# Altium PCB PCB1.PcbDoc (part 3 of 4)
Units mil, origin at the board's own origin, x right, y up, seen from the top; angles counter-clockwise.
Board outline 7000 x 4400 mil, 4 copper layers (Top Layer, Layer 1, Layer 2, Bottom Layer), stack 23.756 mil thick; 175 components, 152 nets, 661 pads, 108 vias.
Unrouted connection lines stored in the file: 53.
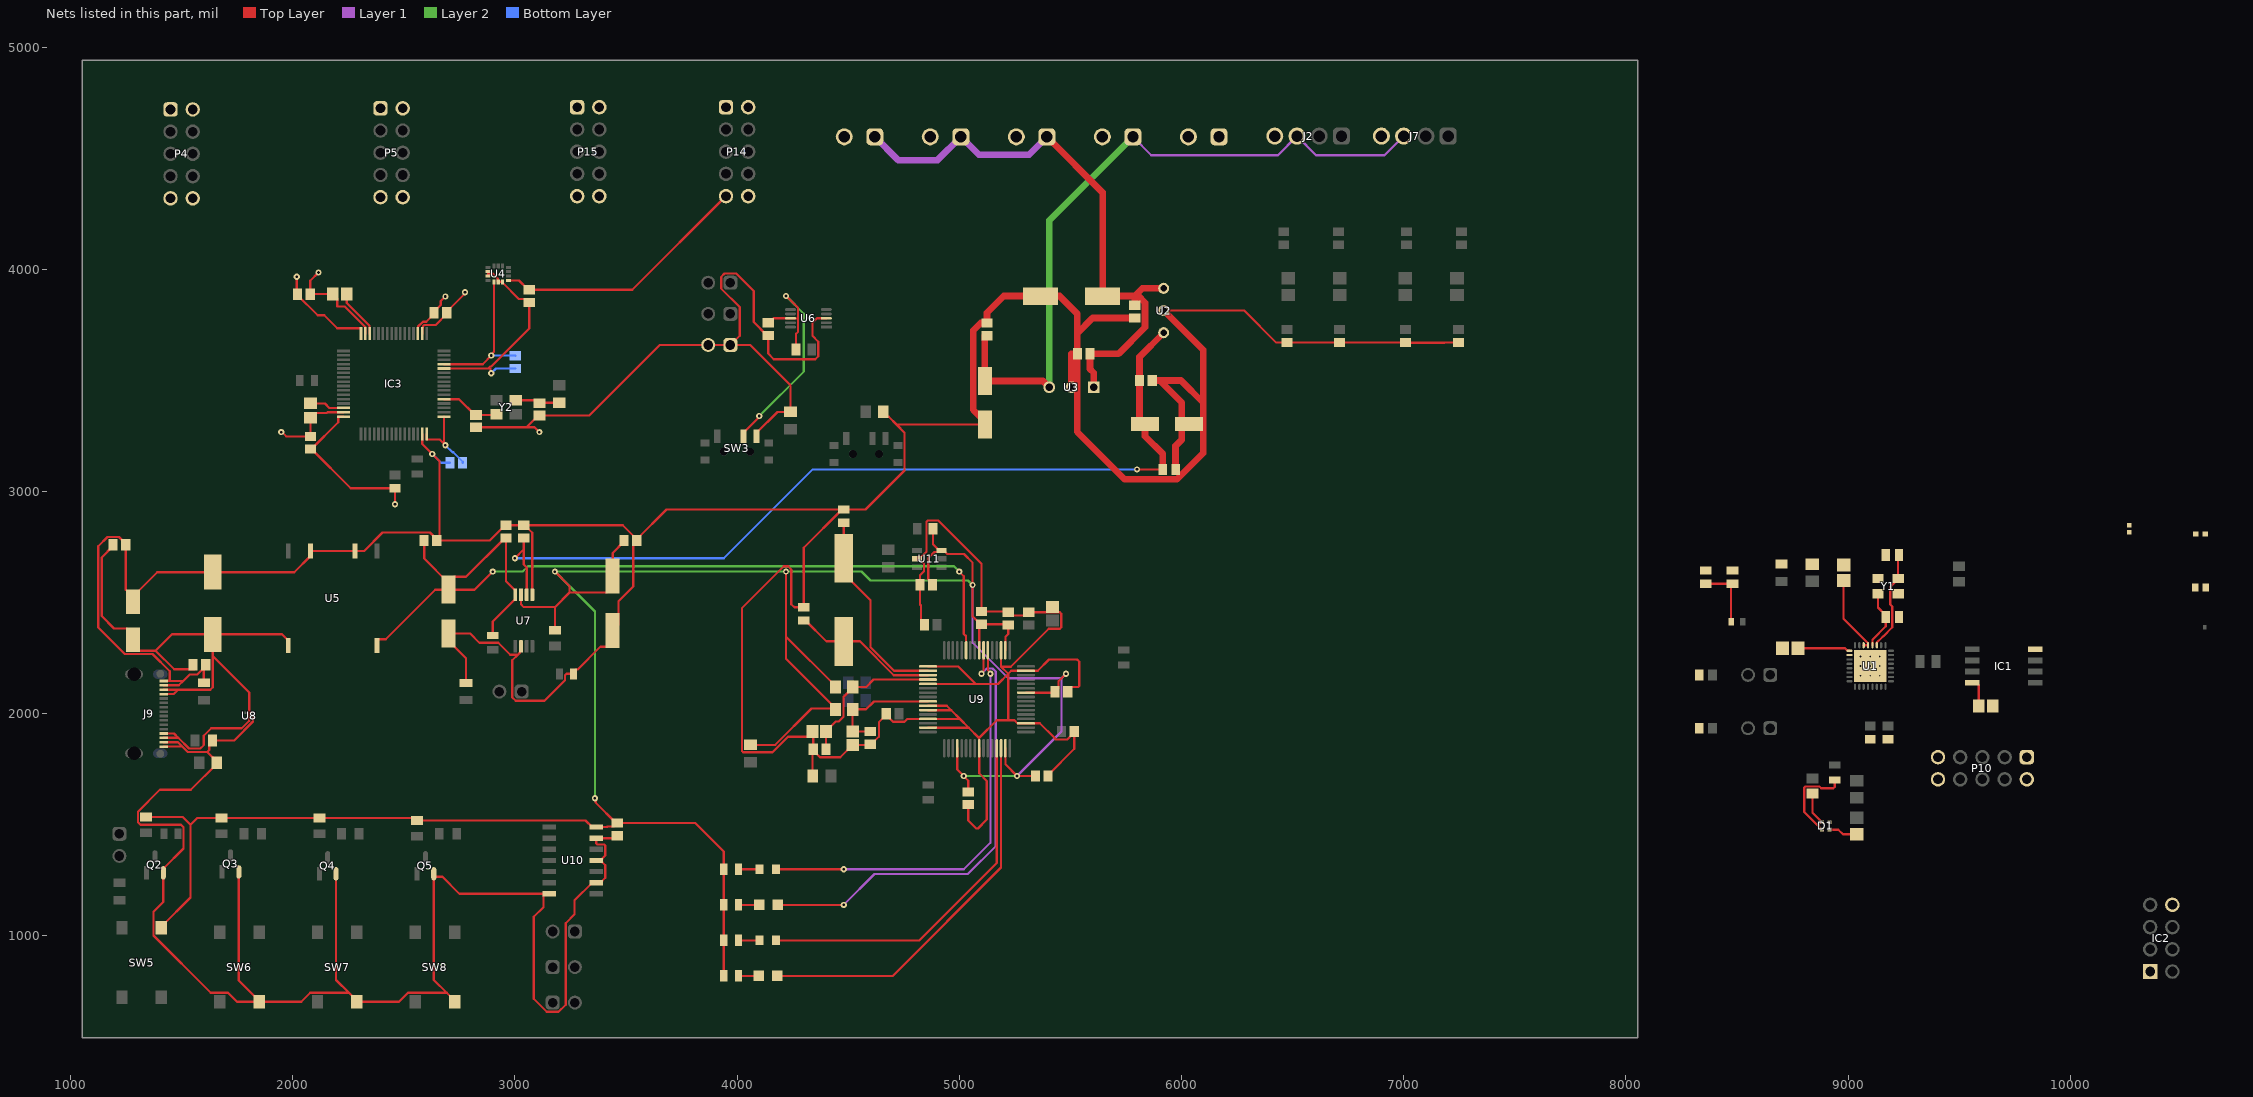
[diagram p4: the nets of this part, all layers, seen from the top]

## Via types
v1: diameter 28, hole 12, Top Layer to Bottom Layer, 98 vias
v2: diameter 19.68, hole 7.87, Top Layer to Bottom Layer, 9 vias
v3: diameter 15, hole 10, Top Layer to Bottom Layer, 1 vias

## Nets (pads, with @x,y where several pads share a name; then routed paths per layer and width w, separated by ;. In a path a pad name is that pad's centre, name@x,y a point inside that pad or via, vN(x,y) a via of type N, cw(c..) or ccw(c..) an arc to the next point about the centre after c; other vN are vias at no path point) (continued)
GND: (continued)
  Top Layer w10: C30.1@1280,2503.31 C30.1@1280,2526.93 ; J9.A12@1419.76,1852.36 1503.14,1852.36 ; J9.B1@1419.76,1872.05 1483.46,1872.05 1503.14,1852.36 ; J9.B12@1419.76,2127.95 1487.55,2127.95 1507.24,2147.64 ; J9.A1@1419.76,2147.64 1507.24,2147.64 ; 1440.66,2148.54 1446.52,2154.4 1446.52,2191.42 1369.04,2268.9 1244.36,2268.9 1125,2388.26 1125,2753.95 1166.64,2795.59 1217.87,2795.59 1248.54,2764.92 C31.1@1248.54,2760 1248.54,2558.39 C30.1@1280,2526.93 ; R39.1@1600,2140 C35.1@1600,2206.54 ; C35.1@1608.54,2220 1600,2211.46 C35.1@1600,2206.54 ; Q3.2@1757.4,1288.33 1757.4,799.61 1848.58,708.43 SW6.2@1848.58,703.5 ; U8.3@1821.57,1991.7 1821.57,1965.36 1736.2,1880 R43.1@1638.74,1880 1624.05,1865.31 1624.05,1837.24 1615.24,1828.43 ; v1(1948.82,3267.72) 1951.49,3267.72 1970.66,3248.54 C24.1@2080,3248.54 C18.2@2080,3333.28 2100.68,3353.96 2152.82,3353.96 2155.91,3357.05 IC3.47@2229.09,3357.05 ; v1(2116.14,3986.22) 2078.98,3949.06 C23.1@2078.98,3889.06 C19.2@2180.17,3889.06 2200.85,3868.37 2200.85,3833.29 2234.07,3833.29 2326.14,3741.21 2326.14,3711.81 IC3.31@2327.05,3710.91 ; Q4.2@2194.8,1280 2194.8,802.2 2252.99,744.02 ; IC3.63@2582.95,3259.09 2582.95,3214.29 v1(2627.95,3169.29) 2660,3137.24 2660,2791.46 C32.1@2648.54,2780 ; IC3.18@2582.95,3710.91 2582.95,3734.04 2586.73,3737.82 2586.73,3744.08 2592.59,3749.94 2643.41,3749.94 2693.54,3800.08 C21.1@2693.54,3805 2693.54,3809.92 2772.15,3888.52 2772.15,3894.19 v1(2775.59,3897.64) ; Q5.2@2634.8,1280 Q5.2@2634.8,1272.27 ; IC3.12@2680.91,3553.9 2879.74,3553.9 2883.76,3557.93 ; SW8.2@2728.58,703.5 2728.58,708.43 2692.99,744.02 ; R42.1@2780,2138.39 2780,2250.08 2700,2330.08 C29.1@2700,2361.57 2798.43,2361.57 2840,2320 2924.97,2320 2979.02,2265.94 3013.47,2265.94 ; C25.1@2824.8,3289.37 3052.01,3289.37 ; U4.3@2879.23,3970.16 2879.23,3980 ; U4.2@2879.23,3989.84 2879.23,3980 ; v1(2893.7,3532.99) 2890.26,3536.44 2890.26,3551.44 2883.76,3557.93 ; U7.2@3027.2,2303.5 3023.35,2299.65 3023.35,2275.82 3013.47,2265.94 ; U7.5@3078.39,2535.79 3078.39,2815.08 C39.1@3044.92,2848.54 ; v1(3110.24,3267.72) 3088.58,3289.37 3052.01,3289.37 ; U10.7@3153.7,1190 U10.7@3135,1190 ; U10.11@3366.3,1340 U10.11@3385,1340 ; C54.1@3460,1451.46 3448.54,1440 U10.13@3366.3,1440 3366.3,1417.67 3372.16,1411.81 3400.95,1411.81 3406.81,1405.95 3406.81,1361.81 U10.11@3385,1340 ; SW3.3@4087.64,3248.9 4087.64,3264.65 4181.73,3358.74 R40.1@4240,3358.74 4240,3478.79 4058.79,3660 P7.1@3970,3660 ; R55.1@4340,1720 4340,1837.09 C50.1@4342.91,1840 ; U6.3@4401.48,3780 4360,3780 4340,3760 4340,3700 4365.12,3674.88 4365.12,3609.28 4351.84,3596 4165.21,3596 4140,3621.21 C33.1@4140,3702.91 4135.08,3702.91 4075,3762.99 4075,3902.91 3996.41,3981.5 3943.59,3981.5 3928.5,3966.41 3928.5,3913.59 4011.5,3830.6 4011.5,3701.5 P7.1@3970,3660 ; R41.1@4658.74,3360 4658.74,3355.08 4677.36,3336.46 4682.28,3336.46 4717.17,3301.57 ; C40.1@4671.46,2000 C40.1@4671.46,1995.08 ; C42.1@4842.91,2400 4827.24,2415.67 4827.24,2487.83 4822.91,2492.16 C55.1@4822.91,2580 4822.91,2622.91 4841.42,2641.42 4841.42,2675.95 4835.56,2681.81 4835.2,2681.81 4819.61,2697.4 U11.2@4809.76,2697.4 4816.57,2704.21 4826.78,2704.21 4852.43,2729.87 4852.43,2863.77 4858.29,2869.63 4905.95,2869.63 5100,2675.58 C46.1@5100,2460 5217.09,2460 5235,2442.09 5312.36,2442.09 5327.23,2456.96 5452.81,2456.96 5458.67,2451.11 5458.67,2388.57 5452.81,2382.71 5402.71,2382.71 5232.13,2212.13 5187.87,2212.13 ; U9.15@4859.13,1937.64 5042.36,1937.64 ; U9.11@4859.13,2016.38 4963.62,2016.38 ; U9.10@4859.13,2036.06 4943.94,2036.06 4963.62,2016.38 ; U9.5@4859.13,2134.49 5074.32,2134.49 ; U9.1@4859.13,2213.23 4995.58,2213.23 5074.32,2134.49 ; C43.1@5040,1591.46 5040.59,1590.86 5040.59,1519.41 5075.86,1484.14 5084.14,1484.14 5124,1524 5124,1697.21 5089.45,1731.77 U9.25@5089.45,1845.12 5089.1,1845.46 5089.1,1890.9 ; C15.1@5115,3301.57 4717.17,3301.57 ; U9.51@5187.87,2286.06 5187.87,2212.13 ; C44.1@5400,1720 5400,1724.92 5517.09,1842.01 5517.09,1915.08 5486.42,1884.41 5435.19,1884.41 5429.33,1890.27 5429.33,1890.67 5362.68,1957.32 U9.35@5300.08,1957.32 5299.73,1957.67 5261.49,1957.67 5248.74,1970.42 5220,1970.42 ; C45.1@5488.54,2100 5488.54,2104.92 5504.21,2120.59 5534.14,2120.59 5540,2126.45 5540,2234.14 5530.14,2244 5404,2244 5353.54,2193.54 U9.47@5300.08,2193.54 5233.54,2193.54 5220,2180 ; U2.2@5920,3815 6282.44,3815 6427,3670.44 R20.1@6474.09,3670.44 R21.1@6711.36,3670.44 R26.1@7008.64,3670.44 7008.64,3670 7183.56,3670 7184,3670.44 R27.1@7245.91,3670.44 ; C30.1@1280,2526.93 1390.24,2637.17 C28.1@1640,2637.17 2006.67,2637.17 2080,2710.5 U5.9@2080,2733 U5.7@2280,2733 2321.36,2733 2403.95,2815.59 2617.87,2815.59 2648.54,2784.92 C32.1@2648.54,2780 ; 1503.14,1852.36 1527.08,1828.43 1615.24,1828.43 ; 1507.24,2147.64 1536.17,2176.57 1570.04,2176.57 C35.1@1600,2206.54 ; 1615.24,1828.43 1658.74,1784.92 R47.2@1658.74,1780 1658.74,1775.08 1541.52,1657.86 1402.02,1657.86 1303.43,1559.26 1303.43,1511.61 1314.85,1500.18 1497.31,1500.18 1508.74,1488.75 1508.74,1394.13 1417.4,1302.79 Q2.2@1417.4,1284.17 1417.4,1152.95 1372.99,1108.54 1372.99,1001.84 1630.82,744.02 1709.15,744.02 1749.66,703.5 SW6.2@1848.58,703.5 ; SW6.2@1848.58,703.5 2038.36,703.5 2078.88,744.02 2252.99,744.02 ; 2252.99,744.02 2288.58,708.43 SW7.2@2288.58,703.5 2478.36,703.5 2518.88,744.02 2692.99,744.02 ; Q5.2@2634.8,1272.27 2640.7,1266.37 2673.63,1266.37 2750,1190 U10.7@3135,1190 ; Q5.2@2634.8,1272.27 2634.8,802.2 2692.99,744.02 ; C32.1@2648.54,2780 2886.53,2780 2955.08,2848.54 C38.1@2960,2848.54 C39.1@3040,2848.54 C39.1@3044.92,2848.54 ; 2879.23,3980 2901.74,3980 2923.11,3958.63 2923.11,3945.96 U4.6@2925,3944.07 2942.8,3944.07 2944.69,3942.18 2944.69,3939.64 3017.21,3867.13 3049.33,3867.13 C22.1@3065,3851.46 3065,3734.29 2893.7,3562.99 2888.83,3562.99 2883.76,3557.93 ; 3013.47,2265.94 2988.5,2240.98 2988.5,2073.59 3003.59,2058.5 3133,2058.5 3225.75,2151.25 3225.75,2173.5 3232.24,2180 R38.1@3262.99,2180 3262.99,2188.86 3273.74,2199.61 3282.6,2199.61 3384.61,2301.61 3413.5,2301.61 3440,2328.11 C34.1@3440,2375.35 3466.5,2401.85 3466.5,2506.5 3532.87,2572.87 3532.87,2764.33 C37.1@3548.54,2780 C37.1@3548.54,2784.92 ; C39.1@3044.92,2848.54 3484.92,2848.54 C37.1@3548.54,2784.92 ; 3052.01,3289.37 3105.08,3342.44 C26.1@3110,3342.44 3334.84,3342.44 3652.4,3660 P7.2@3870,3660 P7.1@3970,3660 ; U10.7@3135,1190 3128.19,1183.19 3128.19,1129.4 3085,1086.21 3085,717.09 3143.59,658.5 3196.41,658.5 3228.5,690.6 3228.5,1057.29 3268.6,1097.39 3268.6,1161 3347.6,1240 U10.9@3366.3,1240 3385,1240 3406.81,1261.81 3406.81,1318.19 U10.11@3385,1340 ; C37.1@3548.54,2784.92 3682.68,2919.06 C56.2@4472.13,2919.06 ; C50.1@4342.91,1840 4342.91,1916.92 C47.2@4339.84,1920 4339.84,1918.46 4317.71,1896.33 4229.06,1896.33 4159.11,1826.38 4027.31,1826.38 4021.46,1832.24 4021.46,2475.4 4210.06,2664 4229.94,2664 4244.18,2649.76 4244.18,2493.3 4258.43,2479.06 C57.2@4300,2479.06 4300,2746.93 C56.2@4472.13,2919.06 ; C50.1@4342.91,1840 4342.91,1835.08 4373.58,1804.41 4464.57,1804.41 4496.33,1836.17 4496.33,1837.71 4518.46,1859.84 C36.2@4520,1859.84 4601.85,1859.84 4638.19,1896.18 4638.19,1961.81 C40.1@4671.46,1995.08 ; C56.2@4472.13,2919.06 C56.2@4480,2919.06 4577.44,2919.06 4753.39,3095 4753.39,3265.35 4717.17,3301.57 ; C40.1@4671.46,1995.08 4702.12,1964.41 4753.36,1964.41 4765.95,1977.01 U9.13@4859.13,1977.01 5002.99,1977.01 ; 4963.62,2016.38 5002.99,1977.01 ; 5002.99,1977.01 5042.36,1937.64 ; 5042.36,1937.64 5089.1,1890.9 ; 5074.32,2134.49 5174.49,2134.49 5220,2180 ; 5089.1,1890.9 5168.62,1970.42 5220,1970.42 ; 5187.87,2212.13 5220,2180 ; 5220,1970.42 5220,2180
  Top Layer w30: C15.1@5115,3301.57 5115,3316 5063,3368 5063,3725 5096.54,3758.54 C17.1@5125,3758.54 5125,3805 5200,3880 C12.1@5365,3880 5451.46,3880 5531.46,3800 5531.46,3712.91 ; U3.2@5505,3470 5505,3620 C16.1@5531,3620 ; C13.1@5790,3781.46 5600,3781.46 5531.46,3712.91 ; C14.1@5868.54,3500 5902,3500 ; U2.2@5920,3815 6098,3637 6098,3400 ; C4.2@5973.51,3100.39 5973.51,3206 6002,3234.49 C11.1@6002,3305 ; C11.1@6033.43,3305 C11.1@6002,3305 ; C16.1@5531,3620 5531,3712.46 5531.46,3712.91 ; C16.1@5531,3620 5531,3269 5745,3055 5979,3055 6098,3174 6098,3400 ; C16.1@5531,3620 C16.1@5531.46,3620 5531.46,3712.91 ; 5902,3500 5998,3500 6098,3400 ; 5902,3500 6002,3400 C11.1@6002,3305
  Bottom Layer w10: v1(2627.95,3169.29) 2667.32,3129.92 C27.1@2707.68,3129.92 ; v1(2893.7,3532.99) 2914.84,3554.13 C20.1@3001.97,3554.13
  other v2: 9056.69,2171.67 9100,2171.67 9143.31,2171.67 9056.69,2214.98 9100,2214.98 9143.31,2214.98 9056.69,2258.29 9100,2258.29 9143.31,2258.29
NetC1_1: C1.1 U1.27 Y1.3 | length 446.3
  Top Layer w10: U1.27@9128.41,2318.47 9128.41,2319.17 9156.5,2347.26 9157.2,2347.26 9198.86,2388.92 9198.86,2482.64 9189.69,2491.81 9189.69,2570.18 9225.28,2605.77 Y1.3@9225.28,2609.43 9225.28,2711.04 C1.1@9229.21,2714.98
NetC2_2: C2.2 IC1.8 | length 129
  Top Layer w10: IC1.8@9558.27,2139.98 9577.95,2139.98 9588.28,2129.66 C2.2@9588.28,2034.98
NetC3_2: C3.2 U1.28 Y1.1 | length 271.7
  Top Layer w10: U1.28@9109.84,2308.48 9109.92,2308.56 9109.92,2333.17 9170.16,2393.41 C3.2@9170.16,2434.98 9170.16,2442.85 9134.72,2478.29 Y1.1@9134.72,2540.53
NetC9_1: C9.1 C10.2
NetC9_2: C9.2 L2.2 U1.2
NetC18_1: C18.1 IC3.46 | length 157.4
  Top Layer w10: C18.1@2080,3396.72 2144.82,3396.72 2164.81,3376.73 IC3.46@2229.09,3376.73
NetC19_1: C19.1 IC3.30 | length 220.9
  Top Layer w10: C19.1@2243.61,3889.06 2243.61,3848.91 2345.83,3746.69 2345.83,3711.81 IC3.30@2346.73,3710.91
NetC25_2: C25.2 IC3.5 Y2.1 | length 265.6
  Top Layer w10: IC3.5@2680.91,3416.1 2748.27,3416.1 2819.88,3344.49 C25.2@2824.8,3344.49 2912.68,3344.49 Y2.1@2915.63,3347.44
NetC26_2: C26.2 R62.1 Y2.3 | length 202.1
  Top Layer w10: Y2.3@3003.31,3411.5 3096.06,3411.5 3107.56,3400 3200,3400 R62.1@3200,3400.63
NetC36_1: C36.1 C49.2 FB1.2 U9.9 | length 533.9
  Top Layer w10: C49.2@4600,1920 C36.1@4520,1920 FB1.2@4520,2020 4580,2020 4615.75,2055.75 U9.9@4859.13,2055.75
NetC47_1: C47.1 C50.2 FB2.2 U9.4 | length 690.8
  Top Layer w10: C50.2@4400,1840 C47.1@4400,1920 4400,1921.54 4443.76,1965.29 4457.09,1965.29 4478.72,1986.92 4478.72,2075.08 4520,2116.36 FB2.2@4520,2120 4580,2120 4614.17,2154.17 U9.4@4859.13,2154.17
NetC56_1: C56.1 U9.2 Y3.1 | length 912.9
  Top Layer w10: C56.1@4480,2860 Y3.1@4480,2700 4480,2631.1 4600,2511.1 4600,2300 4706.11,2193.89 4858.79,2193.89 U9.2@4859.13,2193.54
NetC57_1: C57.1 U9.3 Y3.2 | length 661.1
  Top Layer w10: C57.1@4300,2420 4307.87,2420 4401.89,2325.98 4552.8,2325.98 4704.93,2173.86 U9.3@4859.13,2173.86
NetD1_2: D1.2 R9.1 | length 131.8
  Top Layer w10: D1.2@8916.73,1478.26 8956.37,1478.26 8977.04,1457.59 R9.1@9040,1457.59
NetD1_3: D1.3 R12.1 | length 398.4
  Top Layer w10: D1.3@8883.27,1478.26 8803.19,1558.34 8803.19,1667.38 8809.04,1673.24 8870.96,1673.24 8879.44,1664.76 8934.14,1664.76 8940,1670.62 R12.1@8940,1701.49
NetD1_4: D1.4 R13.1 | length 146.7
  Top Layer w10: R13.1@8840,1640.51 8840,1554.99 D1.4@8883.27,1511.72
NetD2_1: D2.1 U9.29 | length 1654.5
  Top Layer w10: D2.1@4174.8,980 4820,980 5168.19,1328.19 U9.29@5168.19,1845.12
NetD2_2: D2.2 R14.1 | length 93
  Top Layer w10: R14.1@4007,980 D2.2@4100,980
NetD3_1: D3.1 U9.54 | length 1885.6
  Top Layer w10: D3.1@4174.8,1300 v1(4480,1300) ; U9.54@5128.82,2286.06 5128.82,2196.05 5140,2184.87 v1(5140,2180)
  Layer 1 w10: v1(4480,1300) 5020,1300 5140,1420 v1(5140,2180)
NetD3_2: D3.2 R32.1 | length 93
  Top Layer w10: R32.1@4007,1300 D3.2@4100,1300
NetDS1_1: DS1.1 R11.1 | length 90.3
  Top Layer w10: R11.1@4007,820 DS1.1@4097.32,820
NetDS1_2: DS1.2 U9.30 | length 1747.2
  Top Layer w10: DS1.2@4180,820 4700,820 5187.87,1307.87 U9.30@5187.87,1845.12
NetDS2_1: DS2.1 R15.1 | length 93
  Top Layer w10: R15.1@4007,1140 DS2.1@4100,1140
NetDS2_2: DS2.2 U9.55 | length 2066.2
  Top Layer w10: DS2.2@4182.68,1140 v1(4480,1140) ; v1(5100,2180) 5100,2184.87 5109.13,2194 U9.55@5109.13,2286.06
  Layer 1 w10: v1(4480,1140) 4618.62,1278.62 5038.62,1278.62 5164,1404 5164,2189.94 5149.94,2204 5124,2204 v1(5100,2180)